# EAGLE board order1 (EAGLE 5.06)
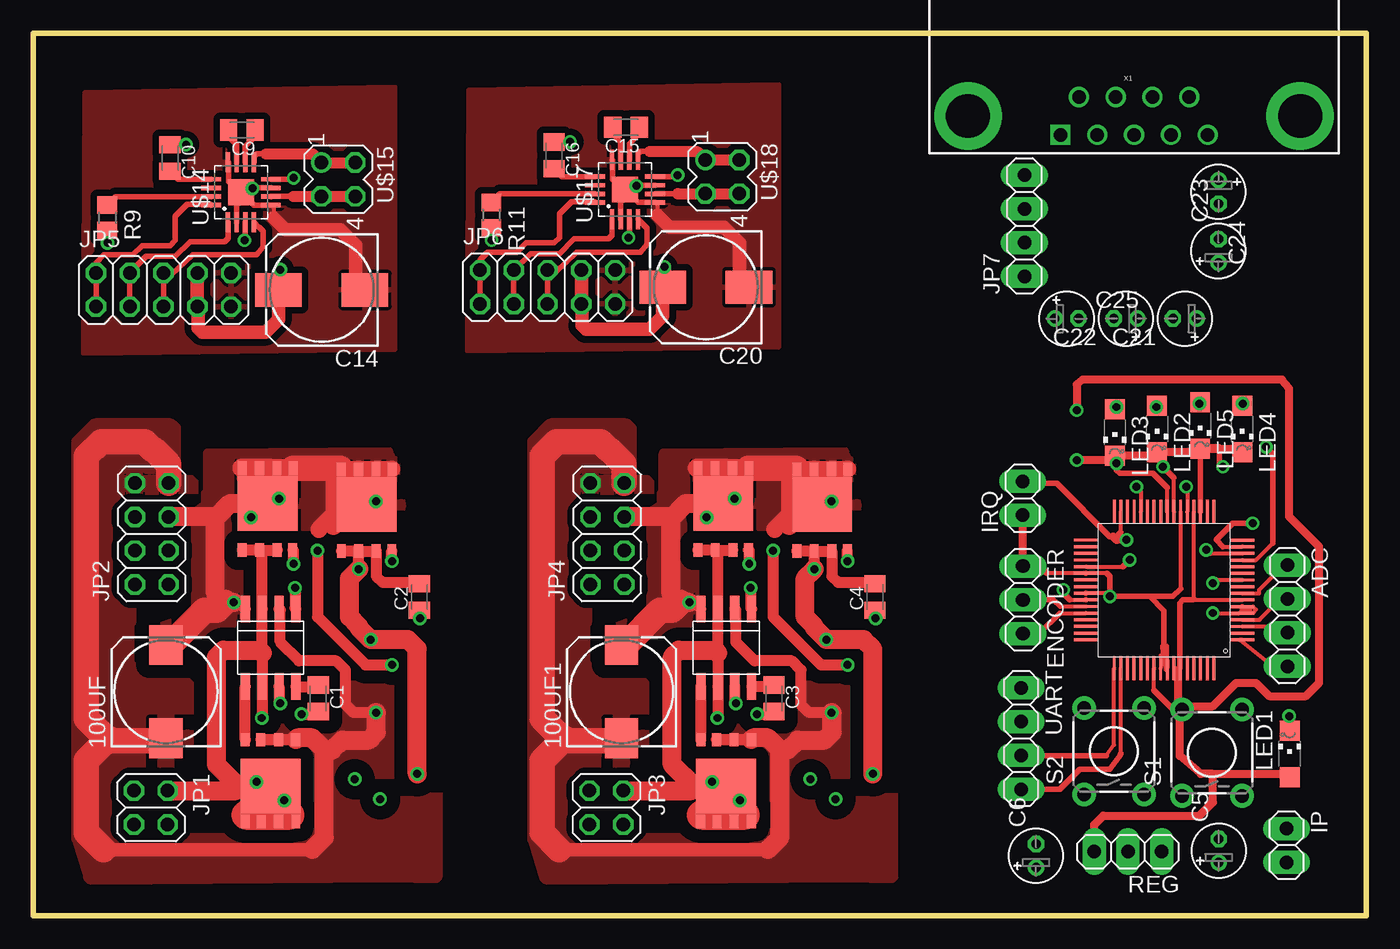
[diagram p0: board, top side]
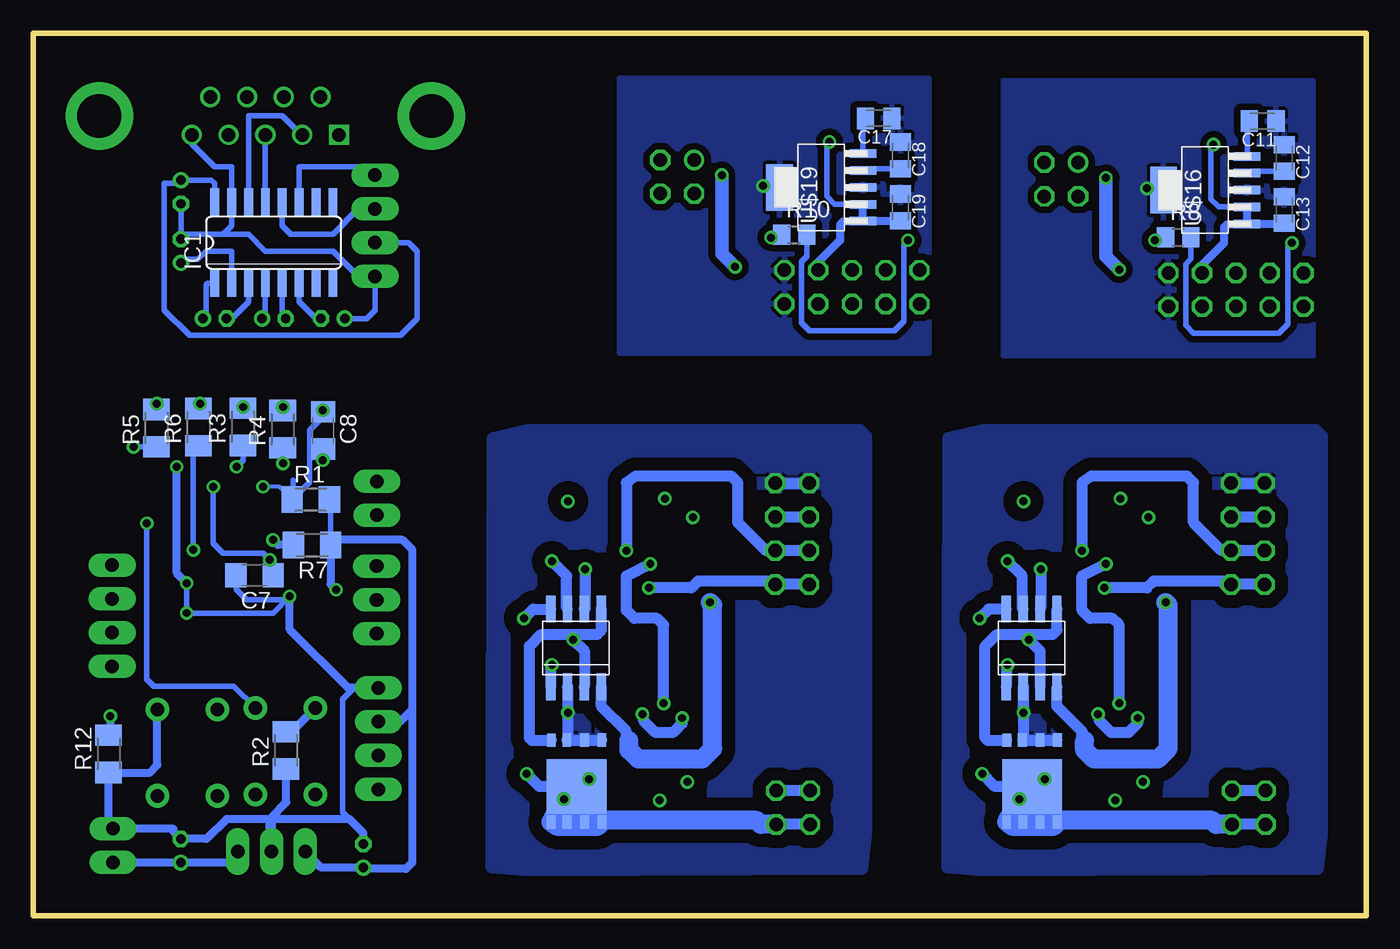
[diagram p1: board, bottom side, seen from below]

Size 100.33 x 66.38 mm. Coordinates in mm from the lower left corner, seen from the top.
Outline: 0,0 100.33,0 100.33,66.38 0,66.38 0,0
Copper layers (1*16): Top 0.035mm / dielectric 1.5mm / Bottom 0.035mm
Design rules "default": minimum track width 10mil, minimum drill 24mil, track to track 8mil, track to pad 8mil, pad to pad 8mil, via to via 8mil, smd to smd 8mil, copper to edge 40mil, drill to drill 8mil, minimum pad ring 10mil, minimum via ring 8mil, stop-mask expansion 4mil, vias tented up to drill 0mil, thermal gap 10mil

## Footprints (pad centres in the part's own frame; a part is rotated, then mirrored left to right if it is on the bottom)
175TMP-0808 = smd 3 x 2.5: + 3.5,0; - -3.5,0
1X04 = drill 1.016 pad 1.778 long: 1 -3.81,0; 2 -1.27,0; 3 1.27,0; 4 3.81,0
C0805K = smd 1.3 x 1.6: 1 -1,0; 2 1,0
E1,8-4 = drill 0.711 pad 1.168 round: + -0.889,0 | drill 0.711 pad 1.168 octagon: - 0.889,0
C1206 = smd 1.6 x 1.8: 1 -1.4,0; 2 1.4,0
153CLV-0810 = smd 3.5 x 2.5: + 3.25,0; - -3.25,0
1X03 = drill 1.016 pad 1.778 long: 1 -2.54,0; 2 0,0; 3 2.54,0
SO16 = smd 0.66 x 2.032: 1 -4.445,-3.073; 2 -3.175,-3.073; 3 -1.905,-3.073; 4 -0.635,-3.073; 5 0.635,-3.073; 6 1.905,-3.073; 7 3.175,-3.073; 8 4.445,-3.073; 9 4.445,3.073; 10 3.175,3.073; 11 1.905,3.073; 12 0.635,3.073; 13 -0.635,3.073; 14 -1.905,3.073; 15 -3.175,3.073; 16 -4.445,3.073
1X02 = drill 1.016 pad 1.778 long: 1 -1.27,0; 2 1.27,0
2X02 = drill 1.016 octagon: 1 -1.27,-1.27; 2 -1.27,1.27; 3 1.27,-1.27; 4 1.27,1.27
2X04 = drill 1.016 octagon: 1 -3.81,-1.27; 2 -3.81,1.27; 3 -1.27,-1.27; 4 -1.27,1.27; 5 1.27,-1.27; 6 1.27,1.27; 7 3.81,-1.27; 8 3.81,1.27
2X05 = drill 1.016 octagon: 1 -5.08,-1.27; 2 -5.08,1.27; 3 -2.54,-1.27; 4 -2.54,1.27; 5 0,-1.27; 6 0,1.27; 7 2.54,-1.27; 8 2.54,1.27; 9 5.08,-1.27; 10 5.08,1.27
CHIPLED_1206 = smd 1.5 x 1.5: A 0,-1.75; C 0,1.75
M1206 = smd 1.6 x 2: 1 -1.4,0; 2 1.4,0
R0805 = smd 1.3 x 1.5: 1 -0.95,0; 2 0.95,0
TACTILE-PTH = drill 1.016 pad 1.778 round: 1 -3.251,2.261; 2 3.251,2.261; 3 -3.251,-2.261; 4 3.251,-2.261
D-SOIC-8 = smd 0.7 x 2: P$1 -1.905,-2.921; P$2 -0.635,-2.921; P$3 0.635,-2.921; P$4 1.905,-2.921; P$5 1.905,2.921; P$6 0.635,2.921; P$7 -0.635,2.921; P$8 -1.905,2.921
QFN-8 = smd 1 x 0.67: P$1 0.53,4.23; P$2 0.53,2.93; P$3 0.53,1.6; P$4 0.54,0.43; P$5 6.69,0.41; P$6 6.7,1.63; P$7 6.69,2.93; P$8 6.69,4.24 | smd 4.1 x 4.5: P$9 4.03,2.33
LQFP64 = smd 0.22 x 1.8: P$1 1.26,-0.885; P$2 1.76,-0.885; P$3 2.26,-0.885; P$4 2.76,-0.885; P$5 3.26,-0.885; P$6 3.76,-0.885; P$7 4.26,-0.885; P$8 4.76,-0.885; P$9 5.26,-0.885; P$10 5.76,-0.885; P$11 6.26,-0.885; P$12 6.76,-0.885; P$13 7.26,-0.885; P$14 7.76,-0.885; P$15 8.26,-0.885; P$16 8.76,-0.885; P$33 8.765,10.885; P$34 8.265,10.885; P$35 7.765,10.885; P$36 7.265,10.885; P$37 6.765,10.885; P$38 6.265,10.885; P$39 5.765,10.885; P$40 5.265,10.885; P$41 4.765,10.885; P$42 4.265,10.885; P$43 3.765,10.885; P$44 3.265,10.885; P$45 2.765,10.885; P$46 2.265,10.885; P$47 1.765,10.885; P$48 1.265,10.885 | smd 1.8 x 0.22: P$17 10.885,1.26; P$18 10.885,1.76; P$19 10.885,2.26; P$20 10.885,2.76; P$21 10.885,3.26; P$22 10.885,3.76; P$23 10.885,4.26; P$24 10.885,4.76; P$25 10.885,5.26; P$26 10.885,5.76; P$27 10.885,6.26; P$28 10.885,6.76; P$29 10.885,7.26; P$30 10.885,7.76; P$31 10.885,8.26; P$32 10.885,8.76; P$49 -0.885,8.765; P$50 -0.885,8.265; P$51 -0.885,7.765; P$52 -0.885,7.265; P$53 -0.885,6.765; P$54 -0.885,6.265; P$55 -0.885,5.765; P$56 -0.885,5.265; P$57 -0.885,4.765; P$58 -0.885,4.265; P$59 -0.885,3.765; P$60 -0.885,3.265; P$61 -0.885,2.765; P$62 -0.885,2.265; P$63 -0.885,1.765; P$64 -0.885,1.265
QFN16 = smd 1.5 x 0.325: 1 -2.25,0.975; 2 -2.25,0.325; 3 -2.25,-0.325; 4 -2.25,-0.975; 9 2.25,-0.975; 10 2.25,-0.325; 11 2.25,0.325; 12 2.25,0.975 | smd 0.325 x 1.5: 5 -0.975,-2.25; 6 -0.325,-2.25; 7 0.325,-2.25; 8 0.975,-2.25; 13 0.975,2.25; 14 0.325,2.25; 15 -0.325,2.25; 16 -0.975,2.25 | smd 1.95 x 1.95: PAD 0,0
HEADER_2X2 = drill 1.016 round: 1 -1.27,-1.27 | drill 1.016 octagon: 2 -1.27,1.27; 3 1.27,-1.27; 4 1.27,1.27
SOT-233-6 = smd 0.635 x 2: 1 -2.54,-3.175; 2 -1.27,-3.175; 3 0,-3.175; 4 1.27,-3.175; 5 2.54,-3.175 | smd 3.5 x 2: 6 0,3.125
DB9 = drill 1.016 square: 1 -5.54,-1.42 | drill 1.016 round: 2 -2.77,-1.42; 3 0,-1.42; 4 2.77,-1.42; 5 5.54,-1.42; 6 -4.15,1.42; 7 -1.38,1.42; 8 1.38,1.42; 9 4.15,1.42 | drill 3.302 pad 5.08 round: G1 -12.5,0; G2 12.5,0

## Placement (x,y rotation side)
100UF  [175TMP-0808]  9.99,16.85 90 top
100UF1  [175TMP-0808]  44.28,16.85 90 top
ADC  [1X04]  94.39,22.55 270 top
C1  1uF  [C0805K]  21.46,16.34 270 top
C2  1uF  [C0805K]  29.06,23.96 90 top
C3  1uF  [C0805K]  55.75,16.34 270 top
C4  1uF  [C0805K]  63.35,23.96 90 top
C5  1u  [E1,8-4]  89.22,4.87 90 top
C6  2.2u  [E1,8-4]  75.47,4.49 90 top
C7  100n  [C1206]  83.67,25.61 180 bottom
C8  0.1u  [C1206]  78.5,36.5 270 bottom
C9  0.1u  [C0805K]  15.71,59.1 180 top
C10  0.1u  [C0805K]  10.3,56.99 270 top
C11  [C0805K]  7.8,59.77 180 bottom
C12  [C0805K]  6.17,56.99 270 bottom
C13  [C0805K]  6.17,53.08 270 bottom
C14  100uF  [153CLV-0810]  21.72,47.07 180 top
C15  0.1u  [C0805K]  44.61,59.3 180 top
C16  0.1u  [C0805K]  39.2,57.19 270 top
C17  [C0805K]  36.7,59.97 180 bottom
C18  [C0805K]  35.07,57.19 270 bottom
C19  [C0805K]  35.07,53.28 270 bottom
C20  100uF  [153CLV-0810]  50.62,47.27 180 top
C21  [E1,8-4]  86.67,44.91 180 top
C22  [E1,8-4]  82.22,44.91 180 top
C23  [E1,8-4]  89.2,49.99 90 top
C24  [E1,8-4]  89.2,54.44 270 top
C25  [E1,8-4]  77.78,44.91 0 top
ENCODER  [1X03]  74.48,23.74 270 top
IC1  MAX3232CSE  [SO16]  82.22,50.63 0 bottom
IP  [1X02]  94.33,5.27 270 top
IRQ  [1X02]  74.47,31.4 90 top
JP1  [2X02]  8.85,8.12 270 top
JP2  [2X04]  8.92,28.72 90 top
JP3  [2X02]  43.14,8.12 270 top
JP4  [2X04]  43.21,28.72 90 top
JP5  [2X05]  9.81,47.08 0 top
JP6  [2X05]  38.71,47.28 0 top
JP7  [1X04]  74.6,51.9 90 top
LED1  [CHIPLED_1206]  94.56,12.16 0 top
LED2  [CHIPLED_1206]  84.58,36.6 180 top
LED3  [CHIPLED_1206]  81.41,36.35 180 top
LED4  [CHIPLED_1206]  90.99,36.6 180 top
LED5  [CHIPLED_1206]  87.82,36.85 180 top
R1  1k  [M1206]  79.44,31.29 0 bottom
R2  1k  [M1206]  81.31,12.43 90 bottom
R3  1k  [M1206]  84.56,36.76 90 bottom
R4  1k  [M1206]  81.56,36.59 90 bottom
R5  1k  [M1206]  91.06,36.67 90 bottom
R6  1k  [M1206]  87.91,36.75 90 bottom
R7  1k  [M1206]  79.35,27.89 180 bottom
R8  3.3k  [R0805]  14.15,51.02 0 bottom
R9  3.3k  [R0805]  5.58,52.5 270 top
R10  3.3k  [R0805]  43.05,51.22 0 bottom
R11  3.3k  [R0805]  34.48,52.7 270 top
R12  1k  [M1206]  94.66,12.16 90 bottom
REG  [1X03]  82.4,4.8 180 top
S1  [TACTILE-PTH]  88.72,12.26 90 top
S2  [TACTILE-PTH]  81.34,12.37 90 top
U$1  TPS2836  [D-SOIC-8]  17.87,20.15 180 top
U$2  TPS2836  [D-SOIC-8]  25.19,20.13 0 bottom
U$3  CSD16404  [QFN-8]  19.97,26.97 90 top
U$4  CSD16404  [QFN-8]  15.53,13.76 270 top
U$5  CSD16404  [QFN-8]  27.42,26.89 90 top
U$6  CSD16404  [QFN-8]  27.48,13.73 270 bottom
U$7  TPS2836  [D-SOIC-8]  52.16,20.15 180 top
U$8  TPS2836  [D-SOIC-8]  59.48,20.13 0 bottom
U$9  CSD16404  [QFN-8]  54.26,26.97 90 top
U$10  CSD16404  [QFN-8]  49.82,13.76 270 top
U$11  CSD16404  [QFN-8]  61.71,26.89 90 top
U$12  CSD16404  [QFN-8]  61.77,13.73 270 bottom
U$13  ADUC7128-LQFP64  [LQFP64]  90.11,19.48 90 top
U$14  DRV8801  [QFN16]  15.64,54.42 90 top
U$15  Bat1  [HEADER_2X2]  22.96,55.38 270 top
U$16  TPS79633  [SOT-233-6]  12.14,54.58 90 bottom
U$17  DRV8801  [QFN16]  44.54,54.62 90 top
U$18  Bat1  [HEADER_2X2]  51.86,55.58 270 top
U$19  TPS79633  [SOT-233-6]  41.04,54.78 90 bottom
UART  [1X04]  74.36,13.31 270 top
X1  [DB9]  82.86,60.16 0 top

## Library data of the parts
100UF 100UF1 C1-C25 R8-R11 = rcl
ADC ENCODER IP IRQ JP1-JP7 REG UART = pinhead
IC1 = maxim
LED1-LED5 = led
R1-R7 R12 = resistor
S1 S2 X1 = SparkFun
U$1-U$12 U$16 U$19 = slom
U$13 = analog-devices
U$14 U$15 U$17 U$18 = igeek

## Nets
2.5V: C7.1 U$13.P$21 U$13.P$37
3.3V: C6.+ LED1.A R1.2 R7.1 REG.3 U$13.P$7 U$13.P$20 U$13.P$42 U$13.P$55 U$13.P$58 U$13.P$59 UART.2
+3V1: C18.2 U$19.4
+3V3: C12.2 U$16.4
+12V: 100UF.+ JP2.5 JP2.6 U$1.P$4 U$2.P$4 U$3.P$5 U$3.P$6 U$3.P$7 U$3.P$8 U$3.P$9 U$5.P$5 U$5.P$6 U$5.P$7 U$5.P$8 U$5.P$9
+12V1: 100UF1.+ JP4.5 JP4.6 U$7.P$4 U$8.P$4 U$9.P$5 U$9.P$6 U$9.P$7 U$9.P$8 U$9.P$9 U$11.P$5 U$11.P$6 U$11.P$7 U$11.P$8 U$11.P$9
/FAULT@1,1: R9.1 U$14.15
/FAULT@1,2: R11.1 U$17.15
/SLEEP@1,1: R8.1 U$14.3
/SLEEP@1,2: R10.1 U$17.3
ENABLE@1: JP6.5 JP6.6 U$17.4
ENABLE@4: JP5.5 JP5.6 U$14.4
GND: 100UF.- JP2.7 JP2.8 U$1.P$2 U$2.P$2 U$4.P$1 U$4.P$2 U$4.P$3 U$6.P$1 U$6.P$2 U$6.P$3
GND1: 100UF1.- JP4.7 JP4.8 U$7.P$2 U$8.P$2 U$10.P$1 U$10.P$2 U$10.P$3 U$12.P$1 U$12.P$2 U$12.P$3
GND2: C5.- C6.- C7.2 C8.2 ENCODER.1 IP.1 IRQ.1 LED2.C LED3.C LED4.C LED5.C R2.1 R12.1 REG.2 S1.4 U$13.P$5 U$13.P$6 U$13.P$10 U$13.P$19 U$13.P$22 U$13.P$38 U$13.P$41 U$13.P$56 U$13.P$57 UART.1
GND3: C11.1 C12.1 C13.1 C14.- JP5.9 JP5.10 U$14.2 U$14.5 U$14.7 U$14.12 U$14.PAD U$16.3 U$16.6
GND4: C17.1 C18.1 C19.1 C20.- JP6.9 JP6.10 U$17.2 U$17.5 U$17.7 U$17.12 U$17.PAD U$19.3 U$19.6
GND5: C23.- C24.- C25.+ IC1.15 JP7.1 X1.5
N$1: C1.2 JP1.1 JP1.2 U$1.P$3 U$1.P$6 U$3.P$1 U$3.P$2 U$3.P$3 U$4.P$5 U$4.P$6 U$4.P$7 U$4.P$8 U$4.P$9
N$2: C1.1 U$1.P$8
N$4: U$1.P$7 U$3.P$4
N$5: U$1.P$5 U$4.P$4
N$7: U$2.P$7 U$5.P$4
N$8: C3.2 JP3.1 JP3.2 U$7.P$3 U$7.P$6 U$9.P$1 U$9.P$2 U$9.P$3 U$10.P$5 U$10.P$6 U$10.P$7 U$10.P$8 U$10.P$9
N$12: U$2.P$5 U$6.P$4
N$14: C2.1 U$2.P$8
N$15: C2.2 JP1.3 JP1.4 U$2.P$3 U$2.P$6 U$5.P$1 U$5.P$2 U$5.P$3 U$6.P$5 U$6.P$6 U$6.P$7 U$6.P$8 U$6.P$9
N$17: JP2.1 JP2.2 U$1.P$1
N$18: JP2.3 JP2.4 U$2.P$1
N$20: C3.1 U$7.P$8
N$21: U$7.P$7 U$9.P$4
N$22: U$7.P$5 U$10.P$4
N$23: U$8.P$7 U$11.P$4
N$24: U$8.P$5 U$12.P$4
N$25: C4.1 U$8.P$8
N$26: C4.2 JP3.3 JP3.4 U$8.P$3 U$8.P$6 U$11.P$1 U$11.P$2 U$11.P$3 U$12.P$5 U$12.P$6 U$12.P$7 U$12.P$8 U$12.P$9
N$27: JP4.1 JP4.2 U$7.P$1
N$28: JP4.3 JP4.4 U$8.P$1
N$37: LED1.C R12.2
N$38: C8.1 R1.1 S1.2 U$13.P$28
N$39: ADC.1 U$13.P$8
N$40: ADC.2 U$13.P$4
N$41: ADC.3 U$13.P$3
N$42: R2.2 S2.2
N$43: S2.4 U$13.P$15
N$44: ADC.4 U$13.P$1
N$45: LED4.A R5.2
N$46: LED5.A R6.2
N$47: R6.1 U$13.P$14
N$48: R5.1 U$13.P$13
N$49: LED2.A R3.2
N$50: LED3.A R4.2
N$51: R3.1 U$13.P$23
N$52: R4.1 U$13.P$24
N$53: IRQ.2 R7.2 U$13.P$31
N$54: C9.1 U$14.10
N$55: C9.2 U$14.11
N$56: U$14.6 U$15.3 U$15.4
N$57: U$14.9 U$15.1 U$15.2
N$58: JP5.1 JP5.2 U$14.16
N$59: C11.2 U$16.5
N$60: C15.1 U$17.10
N$61: C15.2 U$17.11
N$62: U$17.6 U$18.3 U$18.4
N$63: U$17.9 U$18.1 U$18.2
N$64: JP6.1 JP6.2 U$17.16
N$65: C17.2 U$19.5
N$66: C21.+ IC1.1
N$67: C21.- IC1.3
N$68: C22.+ IC1.4
N$69: C22.- IC1.5
N$70: C23.+ IC1.2
N$71: C25.- IC1.6
N$72: IC1.14 X1.2
N$73: IC1.13 X1.3
PHASE@1: JP6.3 JP6.4 U$17.1
PHASE@4: JP5.3 JP5.4 U$14.1
RX: U$13.P$49 UART.3
RX1: IC1.12 JP7.3
S1: ENCODER.2 U$13.P$43
S2: ENCODER.3 U$13.P$44
TX: U$13.P$50 UART.4
TX1: IC1.11 JP7.4
VBB1: C10.1 C13.2 C14.+ JP5.7 JP5.8 U$14.8 U$16.1 U$16.2
VBB2: C16.1 C19.2 C20.+ JP6.7 JP6.8 U$17.8 U$19.1 U$19.2
VCC: C24.+ IC1.16 JP7.2
VCP@1: C16.2 U$17.13
VCP@3: C10.2 U$14.13
VDD: R8.2 R9.2
VDD1: R10.2 R11.2
VIN: C5.+ IP.2 REG.1

## Tracks (layer width: path | path; a pad name or v marks a point on that pad's centre or on a via)
2.5V  (via drill 0.6)
  Top 0.305: U$13.P$37 82.02,26.25 | 86.86,32.19 U$13.P$21
  Top 0.406: 82.02,26.25 v82.53,26.76 | v86.78,32.26 86.86,32.19
  Bottom 0.406: C7.1 82.53,25.86 v82.53,26.76 83.03,27.26 86.03,27.26 86.78,28.01 v86.78,32.26
3.3V  (via drill 0.6)
  Top 0.305: 86.35,15.69 U$13.P$59 86.28,18.67 | 86.03,16.01 86.03,18.6 U$13.P$58 | 84.35,16.94 U$13.P$55 | 78.03,23.76 U$13.P$42 | 87.28,23.75 U$13.P$7 | 87.36,23.82 U$13.P$20
  Top 0.406: 86.03,16.01 86.35,15.69 86.53,15.51 86.28,15.51 85.78,15.51 84.35,16.94 | v77.53,24.51 77.53,24.26 78.03,23.76 | U$13.P$42 | 86.28,18.67 86.28,23.51 86.52,23.75 87.28,23.75 87.36,23.82
  Top 0.61: LED1.A 94.53,10.66 88.78,10.66 | 88.78,10.66 87.88,10.66 86.28,12.01 86.28,15.51 | REG.3 79.86,6.84 80.53,7.51 87.78,7.51 88.78,8.51 88.78,10.66
  Bottom 0.406: R7.1 77.95,31.2 R1.2 | C6.+ 75.47,3.56 75.53,3.51
  Bottom 0.61: C6.+ 78.66,3.6 REG.3 | UART.2 72.71,14.58 71.78,15.51 | 71.78,15.51 71.78,27.51 72.53,28.26 77.58,28.26 R7.1 77.95,24.93 v77.53,24.51 | 75.53,3.51 72.28,3.51 71.78,4.01 71.78,15.51
+3V1
  Bottom 0.406: C18.2 37.73,56.19 U$19.4
+3V3
  Bottom 0.406: C12.2 8.82,55.99 U$16.4
+12V  (via drill 0.6 pad 1.02)
  Top 0.813: U$3.P$7 U$3.P$8 | v15.1,23.56 15.48,23.56 U$1.P$4 | U$5.P$9 25.09,32.98 U$5.P$7 | 26.02,33.58 U$5.P$6
  Top 1.27: U$3.P$7 17.04,32.02 17.5,31.56 | 17.5,31.56 17.5,33.36 17.8,33.66 U$3.P$6 U$3.P$5 | U$3.P$9 17.64,31.42 17.5,31.56 | 22.7,33.76 23,33.76 U$5.P$8 U$5.P$7 U$5.P$6 | U$5.P$5 26.02,33.58 21.5,29.06
  Top 1.422: 15.7,33.66 U$3.P$7 17.8,33.66 U$3.P$5 | 22.7,33.76 22.7,29.46 22.6,29.36 | 14.84,31 U$3.P$9 | 14.84,31 13.7,29.86 13.7,24.26 14.4,23.56 v15.1,23.56 | JP2.5 13.83,29.99 14.84,31
  Top 1.93: 100UF.+ 10.29,20.35 12.9,22.96 13.8,22.96 14.4,23.56 | U$3.P$5 23.1,33.66 U$5.P$8
  Bottom 0.813: U$2.P$4 23.29,16.45 23.3,15.76 21.4,13.86 21.4,13.36 21.2,13.16 | JP2.5 JP2.6
  Bottom 1.422: 21.2,13.16 21.2,12.46 20.5,11.76 15.7,11.76 14.9,12.56 14.9,23.36 v15.1,23.56
  pour Top (isolate 1): 15.1,34.16 26.8,34.26 27.2,34.16 27.2,29.16 15.8,28.96 15.1,29.76 15.2,30.46
  pour Top (isolate 1): 12.3,22.66 12.3,30.36 13.1,30.96 13,31.66 13.2,31.66 13.2,34.76 26.7,34.86 27.1,33.76 28.1,28.26 27.7,27.76 16.9,27.46 16.8,22.66 14.9,22.66 14.8,20.86 9,21.46
+12V1  (via drill 0.6 pad 1.02)
  Top 0.813: U$9.P$7 U$9.P$8 | v49.39,23.56 49.77,23.56 U$7.P$4 | U$11.P$9 59.38,32.98 U$11.P$7 | 60.31,33.58 U$11.P$6
  Top 1.27: U$9.P$7 51.33,32.02 51.79,31.56 | 51.79,31.56 51.79,33.36 52.09,33.66 U$9.P$6 U$9.P$5 | U$9.P$9 51.93,31.42 51.79,31.56 | 56.99,33.76 57.29,33.76 U$11.P$8 U$11.P$7 U$11.P$6 | U$11.P$5 60.31,33.58 55.79,29.06
  Top 1.422: 49.99,33.66 U$9.P$7 52.09,33.66 U$9.P$5 | 56.99,33.76 56.99,29.46 56.89,29.36 | 49.13,31 U$9.P$9 | 49.13,31 47.99,29.86 47.99,24.26 48.69,23.56 v49.39,23.56 | JP4.5 48.12,29.99 49.13,31
  Top 1.93: 100UF1.+ 44.58,20.35 47.19,22.96 48.09,22.96 48.69,23.56 | U$9.P$5 57.39,33.66 U$11.P$8
  Bottom 0.813: U$8.P$4 57.58,16.45 57.59,15.76 55.69,13.86 55.69,13.36 55.49,13.16 | JP4.5 JP4.6
  Bottom 1.422: 55.49,13.16 55.49,12.46 54.79,11.76 49.99,11.76 49.19,12.56 49.19,23.36 v49.39,23.56
  pour Top (isolate 1): 49.39,34.16 61.09,34.26 61.49,34.16 61.49,29.16 50.09,28.96 49.39,29.76 49.49,30.46
  pour Top (isolate 1): 46.59,22.66 46.59,30.36 47.39,30.96 47.29,31.66 47.49,31.66 47.49,34.76 60.99,34.86 61.39,33.76 62.39,28.26 61.99,27.76 51.19,27.46 51.09,22.66 49.19,22.66 49.09,20.86 43.29,21.46
/FAULT@1,1
  Top 0.406: U$14.15 6.22,54.09 R9.1
/FAULT@1,2
  Top 0.406: U$17.15 35.12,54.3 R11.1
/SLEEP@1,1  (via drill 0.6)
  Top 0.406: U$14.3 15.96,50.87 v15.9,50.8
  Bottom 0.406: v15.9,50.8 15.12,51 R8.1
/SLEEP@1,2  (via drill 0.6)
  Top 0.406: U$17.3 44.87,51.06 v44.8,51
  Bottom 0.406: v44.8,51 44.02,51.2 R10.1
ENABLE@1
  Top 0.406: JP6.5 JP6.6 38.86,48.4 39.3,48.4 40.9,49.9 45.7,49.9 46.2,50.5 46.2,51.7 45.9,52 45.88,52 U$17.4
ENABLE@4
  Top 0.406: JP5.5 JP5.6 9.96,48.2 10.4,48.2 12,49.7 16.8,49.7 17.3,50.3 17.3,51.5 17,51.8 16.98,51.8 U$14.4
GND  (via drill 0.6 pad 1.02)
  Top 0.813: U$4.P$3 U$4.P$2 U$4.P$1 | v25.8,15.26 24.1,15.26 23.5,15.86 23.5,18.46 22.8,19.16 20,19.16 18.6,20.56 18.6,22.98 U$1.P$2
  Top 1.016: 5.3,4.96 21,4.96
  Top 1.422: 5.69,13.35 100UF.- | 21,4.96 21.9,5.86 21.9,12.46 | 21.9,12.46 21,13.36 19.89,13.36 U$4.P$1 | 21.9,12.46 22.51,12.46 U$6.P$1 25.27,13.2 25.82,13.76 25.82,15.23 v25.8,15.26
  Top 1.93: JP2.7 10.19,33.97 9.1,35.06 9,35.06 8.4,35.66 5.1,35.66 4,34.56 4,14.86 5.7,13.16 9.8,13.16 100UF.- | 5.69,13.35 4,11.66 4,6.26 5.3,4.96
  Bottom 0.813: U$6.P$1 U$6.P$2 U$6.P$3 25.82,13.26 U$2.P$2 25.8,17.23 v25.8,15.26 | JP2.7 JP2.8
  pour Top (isolate 1): 10.5,32.66 10.5,36.56 10.3,36.76 4.7,36.76 3.5,35.56 3.5,5.86 4.4,2.96 27.1,3.16 30.2,3.06 30.2,16.96 24.6,16.96 23.1,18.46 16.5,18.46 15.2,17.16 15.2,12.56 16.6,11.16 19,11.16 19.7,10.46 19.7,5.66 19.6,5.56 11.1,5.56 10.9,5.36 6.4,5.36 5.4,6.36 5.4,10.46 6.4,11.46 11.5,11.46 11.8,11.76 11.8,16.96 11.3,17.46 8.4,17.46 7,18.86 7,22.06 7.9,22.96 11.3,22.96 12.1,23.76 12.1,32.16 11.6,32.66
  pour Bottom (isolate 1): 3.8,36.46 28.8,36.46 31.4,35.86 31.5,3.66 28.8,3.46 3.7,3.56 3.4,6.26 3.4,36.06
GND1  (via drill 0.6 pad 1.02)
  Top 0.813: U$10.P$3 U$10.P$2 U$10.P$1 | v60.09,15.26 58.39,15.26 57.79,15.86 57.79,18.46 57.09,19.16 54.29,19.16 52.89,20.56 52.89,22.98 U$7.P$2
  Top 1.016: 39.59,4.96 55.29,4.96
  Top 1.422: 39.98,13.35 100UF1.- | 55.29,4.96 56.19,5.86 56.19,12.46 | 56.19,12.46 55.29,13.36 54.18,13.36 U$10.P$1 | 56.19,12.46 56.8,12.46 U$12.P$1 59.55,13.2 60.12,13.76 60.12,15.23 v60.09,15.26
  Top 1.93: JP4.7 44.48,33.97 43.39,35.06 43.29,35.06 42.69,35.66 39.39,35.66 38.29,34.56 38.29,14.86 39.99,13.16 44.09,13.16 100UF1.- | 39.98,13.35 38.29,11.66 38.29,6.26 39.59,4.96
  Bottom 0.813: U$12.P$1 U$12.P$2 U$12.P$3 60.12,13.26 U$8.P$2 60.09,17.23 v60.09,15.26 | JP4.7 JP4.8
  pour Top (isolate 1): 44.79,32.66 44.79,36.56 44.59,36.76 38.99,36.76 37.79,35.56 37.79,5.86 38.69,2.96 61.39,3.16 64.49,3.06 64.49,16.96 58.89,16.96 57.39,18.46 50.79,18.46 49.49,17.16 49.49,12.56 50.89,11.16 53.29,11.16 53.99,10.46 53.99,5.66 53.89,5.56 45.39,5.56 45.19,5.36 40.69,5.36 39.69,6.36 39.69,10.46 40.69,11.46 45.79,11.46 46.09,11.76 46.09,16.96 45.59,17.46 42.69,17.46 41.29,18.86 41.29,22.06 42.19,22.96 45.59,22.96 46.39,23.76 46.39,32.16 45.89,32.66
  pour Bottom (isolate 1): 38.09,36.46 63.09,36.46 65.69,35.86 65.79,3.66 63.09,3.46 37.99,3.56 37.69,6.26 37.69,36.06
GND2  (via drill 0.6)
  Top 0.305: 80.78,24.26 U$13.P$41 | 80.79,25.75 U$13.P$38 | U$13.P$38 76.28,25.76 | 91.28,23.01 91.53,22.76 91.78,22.76 92.03,23.01 91.8,23.25 U$13.P$6 U$13.P$5 | 91.53,23.01 91.28,22.76 | 91,22.98 90.78,22.76 v88.78,22.76 | 89.02,25.25 U$13.P$10 | 86.36,24.59 U$13.P$22 | 87.86,35.09 U$13.P$19 | U$13.P$56 84.85,19.55 85.06,19.76 | U$13.P$57 85.35,19.23 85.07,19.51
  Top 0.406: v81.03,24.01 80.78,24.26 | U$13.P$41 | 80.79,25.75 81.03,25.51 v81.03,24.01 | 85.28,18.53 85.28,20.26 85.03,20.26 85.06,19.76 85.07,19.51 85.1,18.94 85.1,22.94 84.03,24.01 | v81.03,24.01 84.03,24.01 | U$13.P$19 87.86,35.1 LED5.C | v78.53,34.26 78.53,34.01 | ENCODER.1 75.76,26.28 76.28,25.76 | U$13.P$38 | 91.28,23.01 91.53,23.01 | 91,22.98 U$13.P$6 | v88.78,25.01 89.02,25.25 | 86.36,24.59 85.78,24.01 84.03,24.01 | 87.86,35.09 88.03,35.26 89.28,35.26 89.28,34.01 v89.53,33.76
  Top 0.61: ENCODER.1 74.48,30.12 IRQ.1 | v78.53,34.26 79.28,34.26 81.06,34.26 LED3.C 84.33,34.6 LED2.C 87.57,34.85 LED5.C | 87.86,35.1 90.74,35.1 LED4.C
  Bottom 0.406: C8.2 78.5,34.28 v78.53,34.26 | 75.03,17.01 76.28,17.01 77.03,16.26 77.03,7.76 75.53,6.26 75.53,5.51 75.47,5.57 75.47,6.21 | 75.03,17.01 74.28,17.01 | v88.78,25.01 v88.78,22.76 82.28,22.76 v81.03,24.01 81.28,23.76 84.28,23.76 85.07,24.55 C7.2 | UART.1 74.92,17.12 75.03,17.01
  Bottom 0.61: 82.4,7.39 REG.2 82.53,4.93 82.53,7.01 82.78,7.26 85.78,7.26 87.28,5.76 C5.- 89.78,6.31 89.78,6.51 94.33,6.51 IP.1 94.66,6.86 R12.1 91.53,10.76 90.98,11.31 S1.4 | 82.4,7.39 81.28,8.51 81.28,11.01 R2.1 | C6.- 75.47,6.21 76.53,7.26 82.27,7.26 82.4,7.39 | UART.1 76.64,17.12 81.03,21.51 v81.03,24.01 | v89.53,33.76 89.53,25.76 v88.78,25.01
GND3  (via drill 0.6)
  Top 0.305: 18.1,52.5 18.1,53.23 U$14.5
  Top 0.406: U$14.7 15.96,54.74 U$14.PAD | U$14.5 16.61,53.45 U$14.PAD | U$14.12 14.7,56.63 14.7,55.2 15.48,54.42 U$14.PAD | U$14.PAD 16.58,54.42 v16.5,54.7 | U$14.2 15.31,54.09 U$14.PAD | 24.27,47.07 C14.-
  Top 1.016: 24.27,47.07 24.27,50.44 23.1,51.6 19,51.6 18.1,52.5
  Bottom 0.406: v16.5,54.7 15.45,54.4 U$16.6
  pour Top (isolate 0.5): 3.8,42.3 3.9,61.9 27.2,62.3 27.2,42.6
  pour Bottom (isolate 0.5): 4,42.1 4,62.8 27.3,62.8 27.3,42.1
GND4  (via drill 0.6)
  Top 0.305: 47,52.7 47,53.44 U$17.5
  Top 0.406: U$17.7 44.87,54.95 U$17.PAD | U$17.5 45.52,53.65 U$17.PAD | U$17.12 43.6,56.84 43.6,55.4 44.38,54.62 U$17.PAD | U$17.PAD 45.48,54.62 v45.4,54.9 | U$17.2 44.22,54.3 U$17.PAD | 53.16,47.27 C20.-
  Top 1.016: 53.16,47.27 53.16,50.63 52,51.8 47.9,51.8 47,52.7
  Bottom 0.406: v45.4,54.9 44.34,54.6 U$19.6
  pour Top (isolate 0.5): 32.7,42.5 32.8,62.1 56.1,62.5 56.1,42.8
  pour Bottom (isolate 0.5): 32.9,42.3 32.9,63 56.2,63 56.2,42.3
GND5
  Bottom 0.406: C25.+ 75.23,44.91 74.6,45.55 JP7.1 75.87,48.09 77.78,49.99 82.86,49.99 84.12,51.27 86.03,51.27 | 89.2,51.27 C23.- | 89.2,51.27 C24.- 89.2,53.8 | 86.03,51.27 89.2,51.27 | 86.03,51.27 85.39,51.9 IC1.15 85.39,56.34 86.67,56.34 88.39,58.08 X1.5
N$1  (via drill 0.6 pad 1.02)
  Top 0.813: U$4.P$8 U$4.P$7 U$4.P$6 U$4.P$5 15.94,7.5 16,7.56 | U$3.P$2 U$3.P$1 | U$3.P$2 U$3.P$3 | U$3.P$2 17.23,27.3 U$1.P$3 17.23,19.76 U$1.P$6 17.23,14.89 v17.2,14.86 | v20.2,15.16 21.28,15.16 C1.2
  Top 1.27: U$4.P$7 18.46,9.13 U$4.P$9
  Top 1.422: 15.6,9.73 U$4.P$9 | 15.6,9.73 15.43,9.73 13.8,11.36 13.8,19.46 14.3,19.96 17.04,19.96 17.23,19.76 | JP1.2 15.26,9.39 15.6,9.73
  Top 2.184: 16,7.56 19.3,7.56
  Bottom 0.813: v17.2,14.86 17.2,14.46 17.9,13.76 19.2,13.76 20.1,14.66 20.1,15.06 v20.2,15.16 | JP1.1 JP1.2
N$2
  Top 0.813: U$1.P$8 21.35,17.23 C1.1
N$3
  Bottom 2.184: 23.7,7.06 26.5,7.06 26.6,7.16
N$4  (via drill 0.6 pad 1.02)
  Top 0.813: U$1.P$7 18.5,16.05 v18.6,15.96 | v19.6,26.46 19.6,27.45 U$3.P$4
  Bottom 0.813: v18.6,15.96 18.6,21.86 19.1,22.36 20.8,22.36 21.4,22.96 21.4,25.56 v19.6,26.46
N$5
  Top 0.813: U$1.P$5 U$4.P$4
N$6  (via drill 0.6 pad 1.02)
  other vias: 16.4,29.96
N$7  (via drill 0.6 pad 1.02)
  Top 0.813: U$5.P$4 v26.99,26.67 v27,26.66
  Bottom 0.813: v27,26.66 25.9,25.56 25.9,23.13 U$2.P$7
N$8  (via drill 0.6 pad 1.02)
  Top 0.813: U$10.P$8 U$10.P$7 U$10.P$6 U$10.P$5 50.23,7.5 50.29,7.56 | U$9.P$2 U$9.P$1 | U$9.P$2 U$9.P$3 | U$9.P$2 51.52,27.3 U$7.P$3 51.52,19.76 U$7.P$6 51.52,14.89 v51.49,14.86 | v54.49,15.16 55.57,15.16 C3.2
  Top 1.27: U$10.P$7 52.75,9.13 U$10.P$9
  Top 1.422: 49.89,9.73 U$10.P$9 | 49.89,9.73 49.72,9.73 48.09,11.36 48.09,19.46 48.59,19.96 51.33,19.96 51.52,19.76 | JP3.2 49.55,9.39 49.89,9.73
  Top 2.184: 50.29,7.56 53.59,7.56
  Bottom 0.813: v51.49,14.86 51.49,14.46 52.19,13.76 53.49,13.76 54.39,14.66 54.39,15.06 v54.49,15.16 | JP3.1 JP3.2
N$9  (via drill 0.6 pad 1.02)
  other vias: 18.9,8.66
N$10  (via drill 0.6 pad 1.02)
  other vias: 26.1,8.76
N$11  (via drill 0.6 pad 1.02)
  other vias: 16.8,10.06
N$12
  Bottom 0.813: U$2.P$5 23.29,21.48 23.6,21.16 27.8,21.16 28.7,20.26 28.7,13.36 28.5,13.16 27.08,13.16 U$6.P$4
N$13  (via drill 0.6 pad 1.02)
  other vias: 24.2,10.26
N$14  (via drill 0.6 pad 1.02)
  Top 0.813: v29.1,22.36 29.1,22.92 C2.1
  Bottom 0.813: U$2.P$8 28.41,23.05 v29.1,22.36
N$15  (via drill 0.6 pad 1.02)
  Top 0.813: U$5.P$2 U$5.P$1 | U$5.P$2 U$5.P$3 25.82,25.54 26.3,25.06 28.96,25.06 C2.2 | U$5.P$2 24.49,26.77 v24.5,26.06
  Top 1.422: v28.9,10.66 28.9,20.06 28.2,20.76 v25.4,20.76 24.5,21.66 24.5,21.76 23.8,22.46 23.8,25.36 v24.5,26.06
  Bottom 0.813: U$6.P$7 U$6.P$8 | U$6.P$7 U$6.P$6 U$6.P$5 | v24.5,26.06 24.5,23.11 U$2.P$6 | v28.9,10.66 27.94,9.7 U$6.P$9 25.15,7.64 U$6.P$7 | U$2.P$3 24.55,19.91 v25.4,20.76 | JP1.3 JP1.4
  Bottom 1.422: U$6.P$7 24.36,6.85 | JP1.4 11.29,6.85 11.6,7.16 26.95,7.16 U$6.P$5
N$16  (via drill 0.6 pad 1.02)
  other vias: 25.8,31.16
N$17  (via drill 0.6 pad 1.02)
  Top 0.813: v19.7,24.66 19.7,23.15 U$1.P$1
  Bottom 0.813: JP2.2 JP2.1 | JP2.1 10.65,24.91 10.7,24.96 | 10.7,24.96 10.24,24.96 JP2.1 | 10.7,24.96 10.6,25.16 | 10.7,24.96 10.2,24.96 9.9,25.16 | v19.7,24.66 16.5,24.66 16,25.16 10.44,25.16 JP2.1
N$18  (via drill 0.6 pad 1.02)
  Top 0.813: v27,18.86 25,18.86 21.4,22.46 v21.4,27.46
  Bottom 0.813: JP2.4 JP2.3 10.9,27.46 13,29.56 13,32.56 13.5,33.06 20.7,33.06 21.4,32.56 v21.4,27.46 | U$2.P$1 27.09,18.77 v27,18.86
N$19  (via drill 0.6 pad 1.02)
  other vias: 18.5,31.36
N$20
  Top 0.813: U$7.P$8 55.64,17.23 C3.1
N$21  (via drill 0.6 pad 1.02)
  Top 0.813: U$7.P$7 52.8,16.05 v52.89,15.96 | v53.89,26.46 53.89,27.45 U$9.P$4
  Bottom 0.813: v52.89,15.96 52.89,21.86 53.39,22.36 55.09,22.36 55.69,22.96 55.69,25.56 v53.89,26.46
N$22
  Top 0.813: U$7.P$5 U$10.P$4
N$23  (via drill 0.6 pad 1.02)
  Top 0.813: U$11.P$4 v61.28,26.67 v61.29,26.66
  Bottom 0.813: v61.29,26.66 60.19,25.56 60.19,23.13 U$8.P$7
N$24
  Bottom 0.813: U$8.P$5 57.58,21.48 57.89,21.16 62.09,21.16 62.99,20.26 62.99,13.36 62.79,13.16 61.37,13.16 U$12.P$4
N$25  (via drill 0.6 pad 1.02)
  Top 0.813: v63.39,22.36 63.39,22.92 C4.1
  Bottom 0.813: U$8.P$8 62.7,23.05 v63.39,22.36
N$26  (via drill 0.6 pad 1.02)
  Top 0.813: U$11.P$2 U$11.P$1 | U$11.P$2 U$11.P$3 60.11,25.54 60.59,25.06 63.25,25.06 C4.2 | U$11.P$2 58.78,26.77 v58.79,26.06
  Top 1.422: v63.19,10.66 63.19,20.06 62.49,20.76 v59.69,20.76 58.79,21.66 58.79,21.76 58.09,22.46 58.09,25.36 v58.79,26.06
  Bottom 0.813: U$12.P$7 U$12.P$8 | U$12.P$7 U$12.P$6 U$12.P$5 | v58.79,26.06 58.79,23.11 U$8.P$6 | v63.19,10.66 62.23,9.7 U$12.P$9 59.44,7.64 U$12.P$7 | U$8.P$3 58.84,19.91 v59.69,20.76 | JP3.3 JP3.4
  Bottom 1.422: U$12.P$7 58.65,6.85 | JP3.4 45.58,6.85 45.89,7.16 61.24,7.16 U$12.P$5
N$27  (via drill 0.6 pad 1.02)
  Top 0.813: v53.99,24.66 53.99,23.15 U$7.P$1
  Bottom 0.813: JP4.2 JP4.1 | JP4.1 44.94,24.91 44.99,24.96 | 44.99,24.96 44.53,24.96 JP4.1 | 44.99,24.96 44.89,25.16 | 44.99,24.96 44.49,24.96 44.19,25.16 | v53.99,24.66 50.79,24.66 50.29,25.16 44.73,25.16 JP4.1
N$28  (via drill 0.6 pad 1.02)
  Top 0.813: v61.29,18.86 59.29,18.86 55.69,22.46 v55.69,27.46
  Bottom 0.813: JP4.4 JP4.3 45.19,27.46 47.29,29.56 47.29,32.56 47.79,33.06 54.99,33.06 55.69,32.56 v55.69,27.46 | U$8.P$1 61.38,18.77 v61.29,18.86
N$29
  Bottom 2.184: 57.99,7.06 60.79,7.06 60.89,7.16
N$30  (via drill 0.6 pad 1.02)
  other vias: 50.69,29.96
N$31  (via drill 0.6 pad 1.02)
  other vias: 53.19,8.66
N$32  (via drill 0.6 pad 1.02)
  other vias: 60.39,8.76
N$33  (via drill 0.6 pad 1.02)
  other vias: 51.09,10.06
N$34  (via drill 0.6 pad 1.02)
  other vias: 58.49,10.26
N$35  (via drill 0.6 pad 1.02)
  other vias: 60.09,31.16
N$36  (via drill 0.6 pad 1.02)
  other vias: 52.79,31.36
N$37  (via drill 0.6)
  Top 0.61: LED1.C 94.56,14.98 v94.53,15.01
  Bottom 0.61: v94.53,15.01 94.45,13.51 R12.2
N$38  (via drill 0.6)
  Top 0.305: U$13.P$28 83.36,31.93 v83.03,32.26
  Top 0.406: 86.66,15.63 86.78,15.51 | 86.66,15.63 86.53,15.76 | S1.2 86.53,15.51 86.66,15.63
  Top 0.61: 86.53,15.76 88.78,15.76 90.53,17.51 92.03,17.51 93.03,16.51 95.78,16.51 96.78,17.51 96.78,27.76 94.53,30.01 94.53,39.66 93.98,40.31 78.98,40.31 78.53,39.96 v78.53,38.01
  Bottom 0.305: v83.03,32.26 81.81,32.26 R1.1
  Bottom 0.406: C8.1 78.5,37.53 79.53,36.51 79.53,32.59 R1.1 80.78,31.34 80.78,32.76
  Bottom 0.61: v78.53,38.01 78.53,37.92 C8.1
N$39
  Top 0.305: U$13.P$8 92.27,24.25 92.27,24.5 93.78,26.01 94.03,26.01 ADC.1
N$40
  Top 0.305: U$13.P$4 92.31,22.25 92.31,22.29 93.78,23.76 94.33,23.76 ADC.2
N$41
  Top 0.305: U$13.P$3 93.92,21.75
  Top 0.406: 93.92,21.75 ADC.3
N$42
  Bottom 0.61: R2.2 80.88,13.83 S2.2
N$43  (via drill 0.6)
  Top 0.305: 89.55,27.75 U$13.P$15
  Top 0.406: 89.55,27.75 89.03,28.26 90.28,29.51 v91.78,29.51
  Bottom 0.406: v91.78,29.51 91.78,17.76 91.28,17.26 85.24,17.26 S2.4
N$44
  Top 0.305: U$13.P$1 90.8,20.75 93.28,18.76
  Top 0.406: 93.28,18.76 94.36,18.76 ADC.4
N$45  (via drill 0.6)
  Top 0.406: LED4.A 90.99,38.47 v91.03,38.51
  Bottom 0.406: v91.03,38.51 91.03,38.09 R5.2
N$46  (via drill 0.6)
  Top 0.406: LED5.A 87.82,38.47 v87.78,38.51
  Bottom 0.406: v87.78,38.51 87.78,38.27 R6.2
N$47  (via drill 0.6)
  Top 0.305: 88.55,27.25 U$13.P$14
  Top 0.406: v88.28,27.51 88.55,27.25
  Bottom 0.406: v88.28,27.51 88.28,34.98 R6.1
N$48  (via drill 0.6)
  Top 0.305: U$13.P$13 92.02,26.75 93.28,28.01
  Top 0.406: 93.28,28.01 93.28,34.76 v92.78,35.26
  Bottom 0.406: v92.78,35.26 R5.1
N$49  (via drill 0.6)
  Top 0.406: LED2.A 84.58,38.21 v84.53,38.26
  Bottom 0.406: v84.53,38.26 84.53,38.19 R3.2
N$50  (via drill 0.6)
  Top 0.406: LED3.A 81.41,38.14 v81.53,38.26
  Bottom 0.406: v81.53,38.26 81.53,38.02 R4.2
N$51  (via drill 0.6)
  Top 0.305: U$13.P$23 85.86,32.94
  Top 0.406: 85.86,32.94 v85.03,33.76
  Bottom 0.406: v85.03,33.76 84.53,34.26 84.53,35.34 R3.1
N$52  (via drill 0.6)
  Top 0.305: U$13.P$24 85.36,32.19
  Top 0.406: 85.36,32.19 84.28,33.26 81.78,33.26 81.53,33.51 v81.53,34.01
  Bottom 0.406: v81.53,34.01 81.53,35.16 R4.1
N$53  (via drill 0.6)
  Top 0.305: 81.86,28.84 U$13.P$31
  Top 0.406: 81.86,28.84 81.53,28.51 81.28,28.51 81.03,28.51 77.03,32.51 74.64,32.51 IRQ.2
  Top 0.61: v82.28,28.26 81.53,28.26 81.28,28.51
  Bottom 0.61: R7.2 81.91,27.89 v82.28,28.26
N$54
  Top 0.406: U$14.10 15.96,57.87 16.7,58.6 C9.1
N$55
  Top 0.406: U$14.11 15.31,57.98 14.7,58.6 C9.2
N$56
  Top 0.406: 19.6,54.1 U$14.6
  Top 0.813: U$15.4 U$15.3 19.61,54.11 19.6,54.1
N$57
  Top 0.406: U$14.9 16.61,57.12 16.8,57.3 17.5,57.3
  Top 0.813: 17.5,57.3 21.04,57.3 U$15.1 U$15.2
N$58
  Top 0.406: JP5.1 JP5.2 4.73,49.13 5.3,49.7 7.5,49.7 8.2,50.4 10.3,50.4 10.7,50.8 10.7,52.6 11.6,53.5 13.34,53.5 U$14.16
N$59
  Bottom 0.406: U$16.5 8.96,59.6 C11.2
N$60
  Top 0.406: U$17.10 44.87,58.06 45.6,58.8 C15.1
N$61
  Top 0.406: U$17.11 44.22,58.19 43.6,58.8 C15.2
N$62
  Top 0.406: 48.5,54.3 U$17.6
  Top 0.813: U$18.4 U$18.3 48.51,54.31 48.5,54.3
N$63
  Top 0.406: U$17.9 45.52,57.31 45.7,57.5 46.4,57.5
  Top 0.813: 46.4,57.5 49.94,57.5 U$18.1 U$18.2
N$64
  Top 0.406: JP6.1 JP6.2 33.63,49.33 34.2,49.9 36.4,49.9 37.1,50.6 39.2,50.6 39.6,51 39.6,52.8 40.5,53.7 42.23,53.7 U$17.16
N$65
  Bottom 0.406: U$19.5 37.87,59.8 C17.2
N$66
  Bottom 0.406: IC1.1 87.2,47.56 87.3,47.45 87.3,44.91 C21.+
N$67
  Bottom 0.406: C21.- 85.39,44.91 84.12,46.19 IC1.3
N$68
  Bottom 0.406: C22.+ 82.86,44.91 IC1.4
N$69
  Bottom 0.406: C22.- 81.58,44.91 IC1.5
N$70
  Bottom 0.406: IC1.2 85.39,49.99 87.3,49.99 87.94,49.36 89.2,49.36 C23.+
N$71
  Bottom 0.406: C25.- 79.05,44.91 80.31,46.19 IC1.6
N$72
  Bottom 0.406: IC1.14 84.12,60.16 81.58,60.16 80.17,58.73 X1.2
N$73
  Bottom 0.406: IC1.13 X1.3
PHASE@1
  Top 0.406: JP6.3 JP6.4 37.42,49.8 39.6,49.8 40.7,50.9 43.3,50.9 43.56,51.16 U$17.1
PHASE@4
  Top 0.406: JP5.3 JP5.4 8.52,49.6 10.7,49.6 11.8,50.7 14.4,50.7 14.66,50.97 U$14.1
RX
  Top 0.305: U$13.P$49 81.35,12.83 80.78,12.01
  Top 0.406: 80.78,12.01 74.39,12.01 UART.3
RX1
  Bottom 0.406: JP7.3 75.87,53.17 77.78,51.27 80.95,51.27 81.58,51.9 IC1.12 81.58,53.8
S1
  Top 0.305: 77.29,23.25 U$13.P$43
  Top 0.406: 77.29,23.25 76.78,23.76 74.5,23.76 ENCODER.2
S2
  Top 0.305: 77.27,22.75 U$13.P$44
  Top 0.406: 77.27,22.75 75.78,21.26 74.55,21.26 ENCODER.3
TX
  Top 0.305: 81.85,12.19 U$13.P$50
  Top 0.406: UART.4 77.27,9.5 78.78,11.01 81.03,11.01 81.78,12.01 81.85,12.19
TX1
  Bottom 0.406: JP7.4 75.23,56.34 80.31,56.34 IC1.11
VBB1  (via drill 0.6)
  Top 0.406: U$14.8 19.5,55.4 v19.6,55.5 | v11.5,58 C10.1
  Top 1.016: JP5.8 JP5.7 12.4,45.76 12.4,44.2 12.7,43.9 17.5,43.9 18.47,44.87 C14.+ 18.6,47.2 v18.6,48.6
  Bottom 0.406: U$16.2 11.11,53.31 11.7,53.9 11.7,57.8 v11.5,58
  Bottom 0.61: JP5.8 12.35,48.95 10.7,50.6 10.7,51.8 10.5,52 9.01,52 U$16.1 | U$16.1 6.21,52.04 C13.2 | U$16.1 U$16.2
  Bottom 1.016: v19.6,55.5 19.6,49.6 v18.6,48.6
VBB2  (via drill 0.6)
  Top 0.406: U$17.8 48.4,55.59 v48.5,55.7 | v40.4,58.2 C16.1
  Top 1.016: JP6.8 JP6.7 41.3,45.96 41.3,44.4 41.6,44.1 46.4,44.1 47.37,45.07 C20.+ 47.5,47.4 v47.5,48.8
  Bottom 0.406: U$19.2 40.01,53.51 40.6,54.1 40.6,58 v40.4,58.2
  Bottom 0.61: JP6.8 41.25,49.15 39.6,50.8 39.6,52 39.4,52.2 37.91,52.2 U$19.1 | U$19.1 35.11,52.24 C19.2 | U$19.1 U$19.2
  Bottom 1.016: v48.5,55.7 48.5,49.8 v47.5,48.8
VCC
  Bottom 0.406: IC1.16 86.67,55.08 86.92,55.33 C24.+ 89.2,55.08 90.47,55.08 90.47,45.55 88.57,43.65 72.69,43.65 71.42,44.91 71.42,49.99 72.06,50.63 JP7.2
VCP@1
  Top 0.406: U$17.13 39.8,55.59 C16.2
VCP@3
  Top 0.406: U$14.13 10.89,55.4 C10.2
VDD  (via drill 0.6)
  Top 0.406: v5.6,50.6 5.6,51.53 R9.2
  Bottom 0.406: R8.2 13.2,49.4 13.6,49 13.6,44.4 13,43.8 6.6,43.8 5.9,44.5 5.9,50.3 v5.6,50.6
VDD1  (via drill 0.6)
  Top 0.406: v34.5,50.8 34.5,51.73 R11.2
  Bottom 0.406: R10.2 42.1,49.6 42.5,49.2 42.5,44.6 41.9,44 35.5,44 34.8,44.7 34.8,50.5 v34.5,50.8
VIN
  Bottom 0.61: IP.2 94.33,3.98 C5.+ 85.76,3.98 REG.1